# Altium PCB PCB_ControlBoard.PcbDoc
Units mm, origin at the board's own origin, x right, y up, seen from the top; angles counter-clockwise.
Board outline 65 x 70 mm, 2 copper layers (Top Layer, Bottom Layer), stack 1.671 mm thick; 49 components, 36 nets, 166 pads, 34 vias.
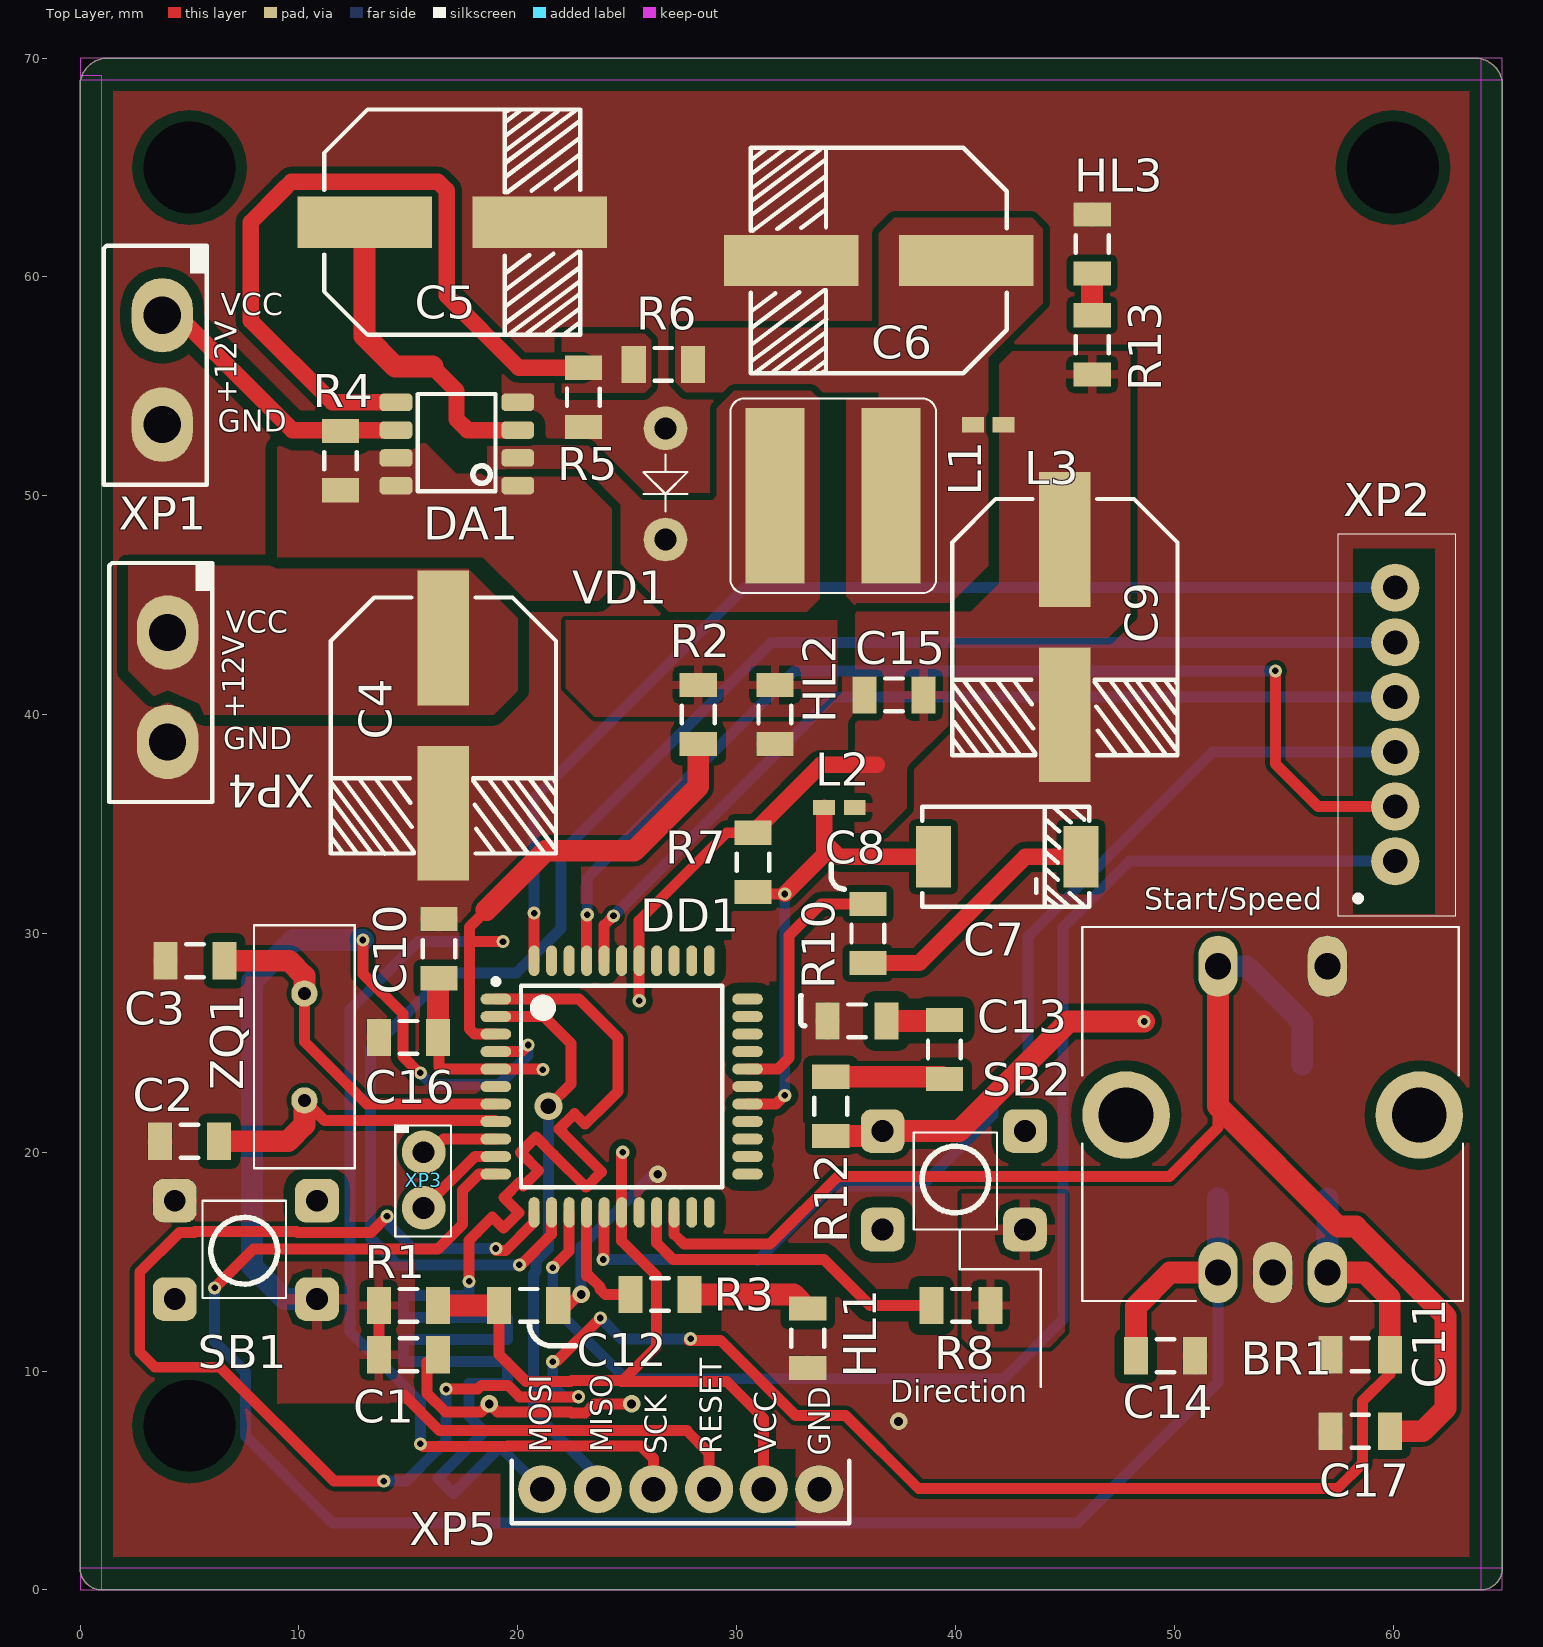
[diagram p0: Top Layer view]
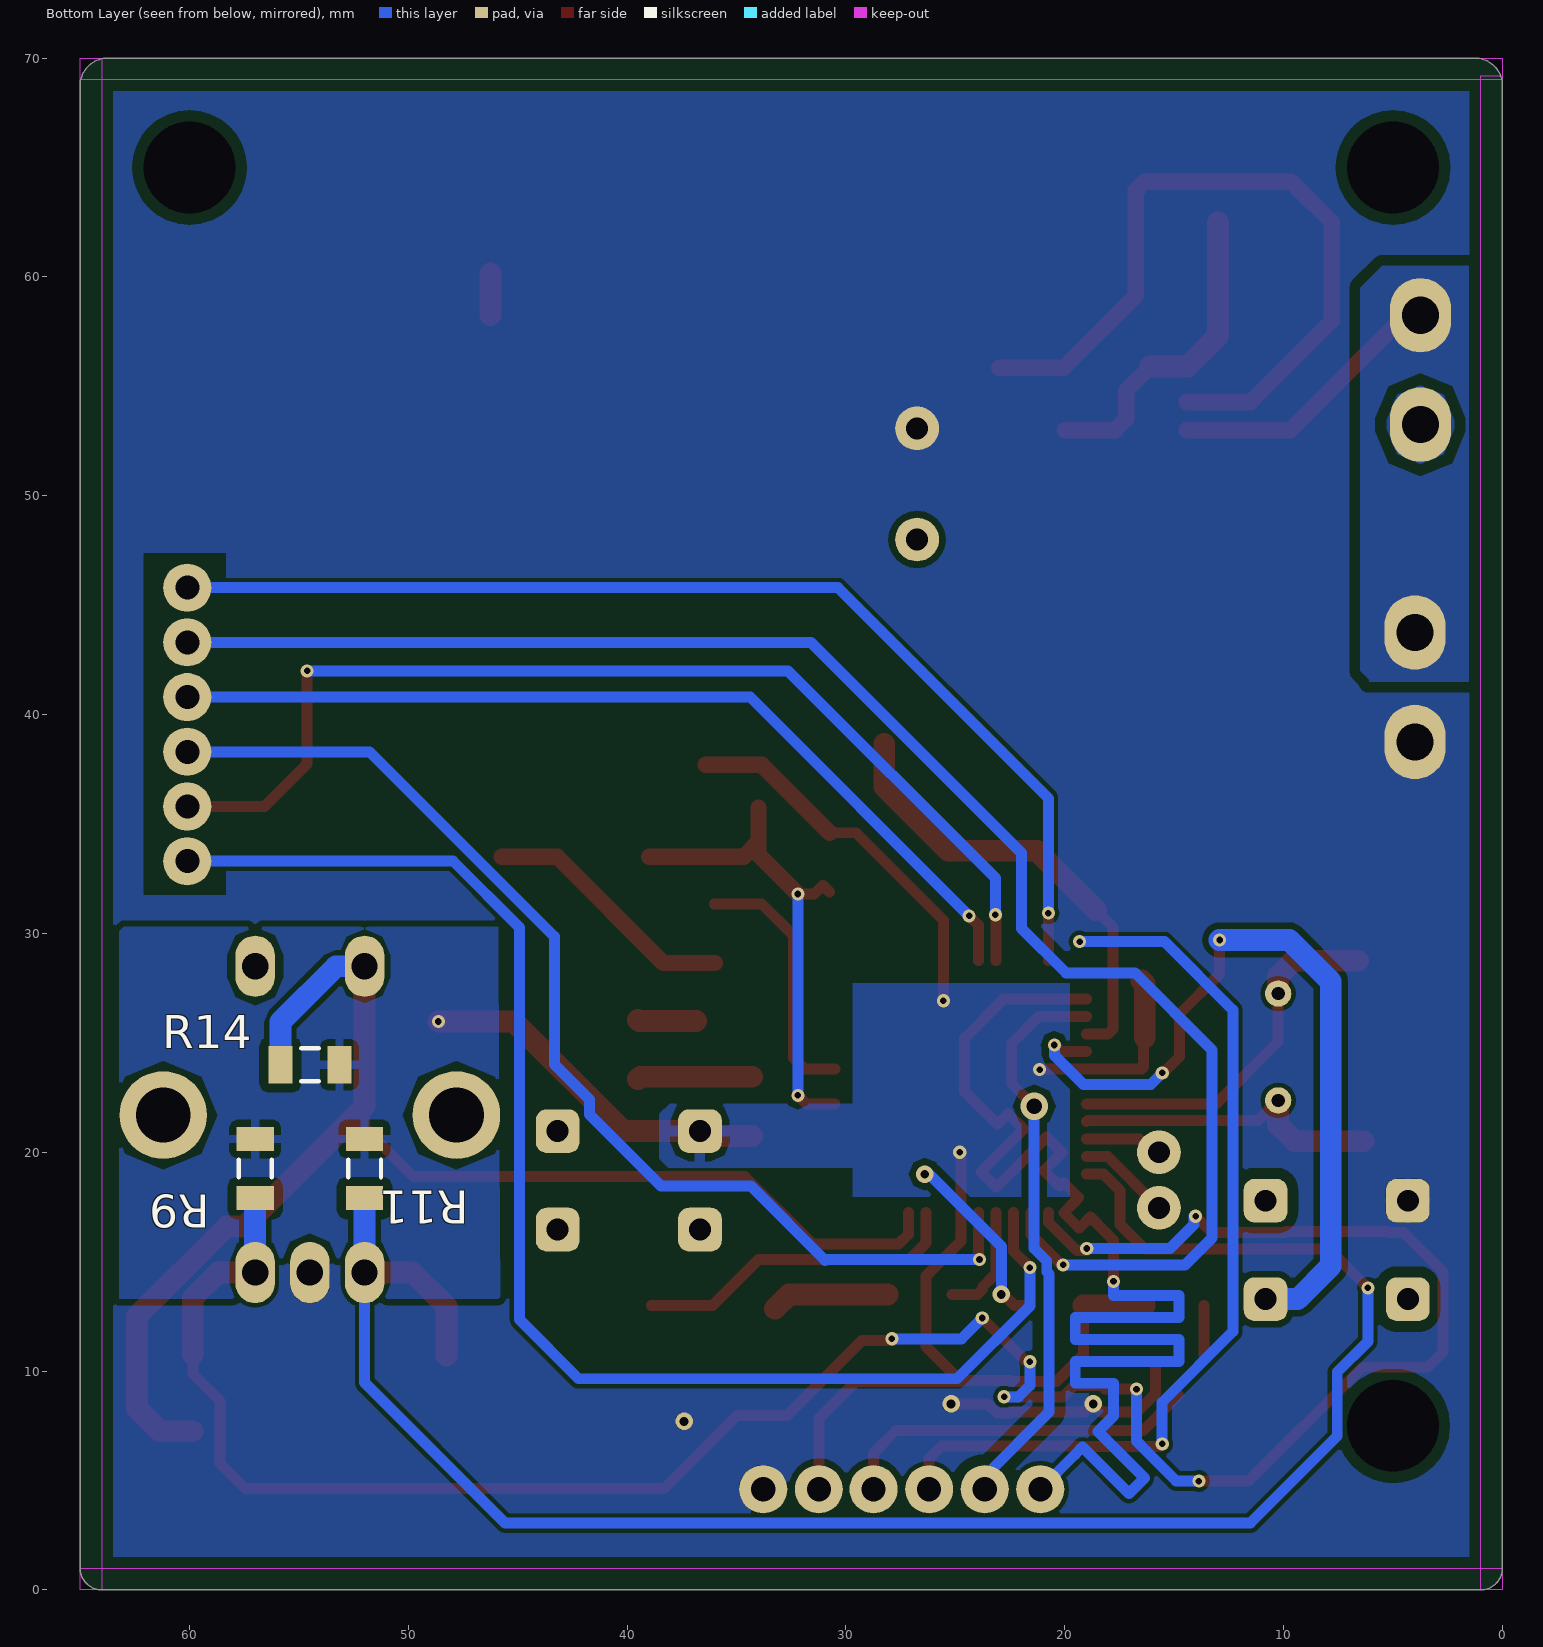
[diagram p1: Bottom Layer view, seen from below]
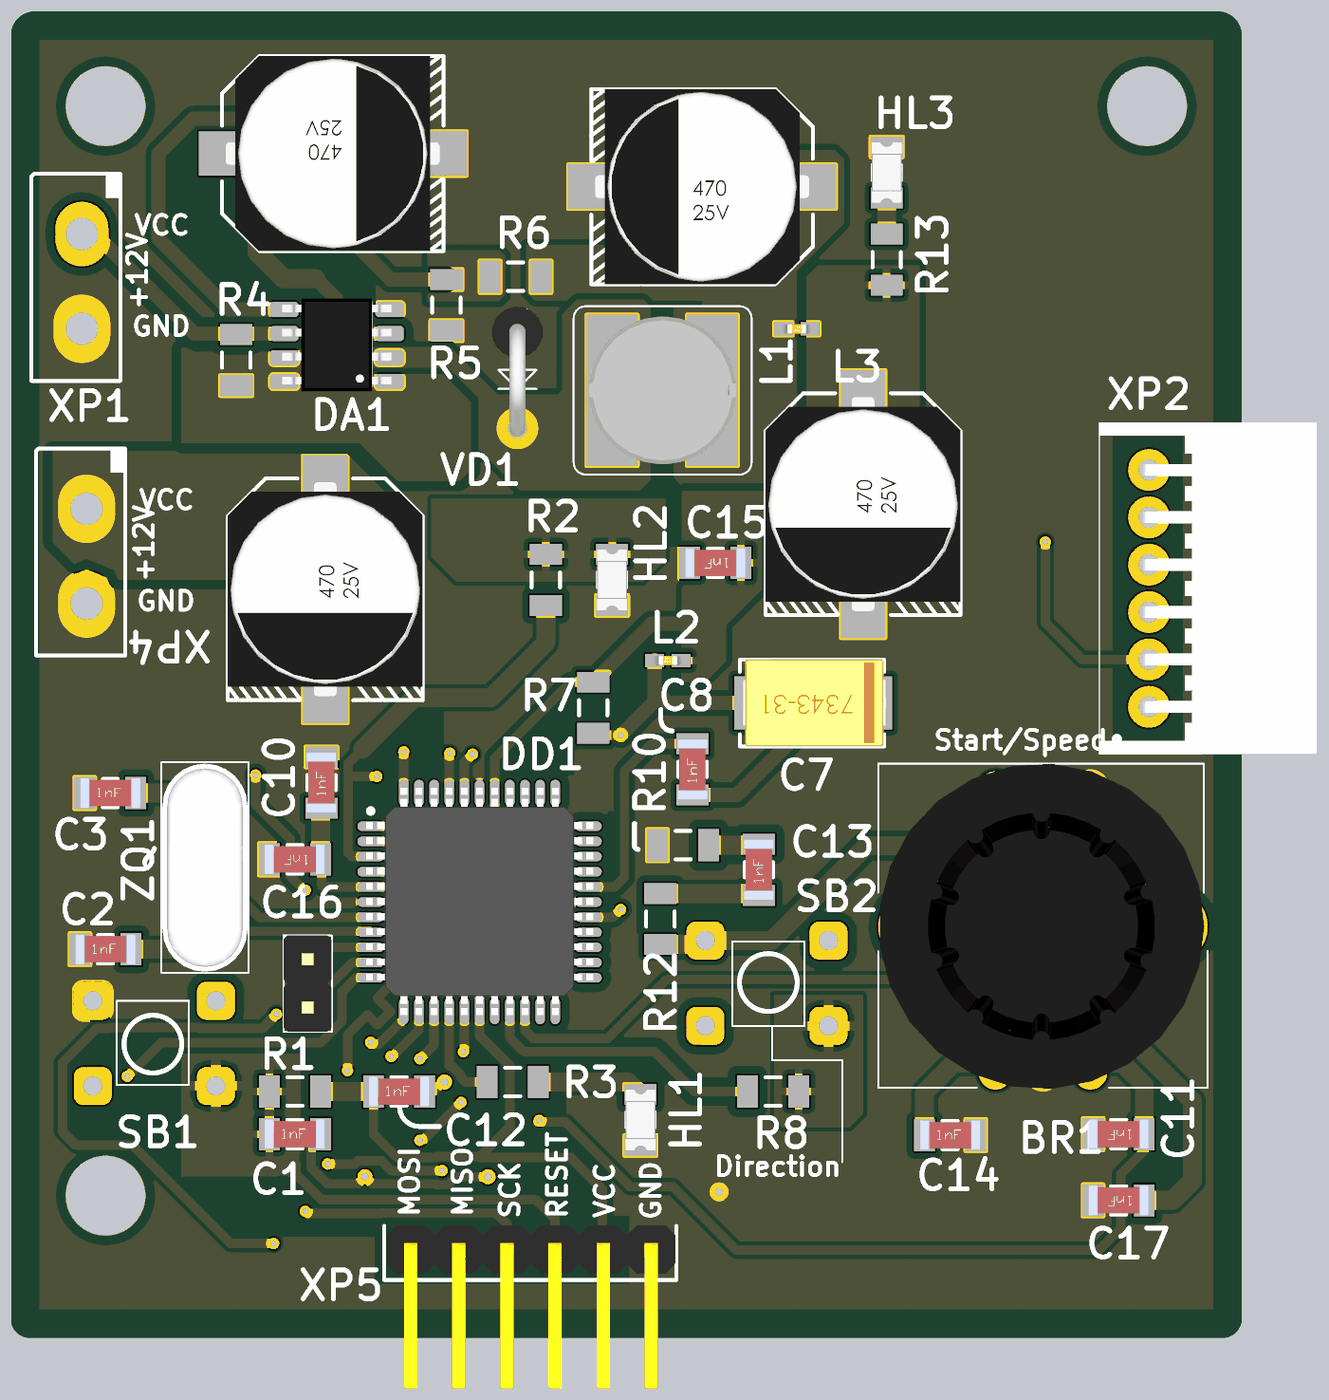
[diagram p2: 3D render of the assembled board from above, using the file's embedded part models]
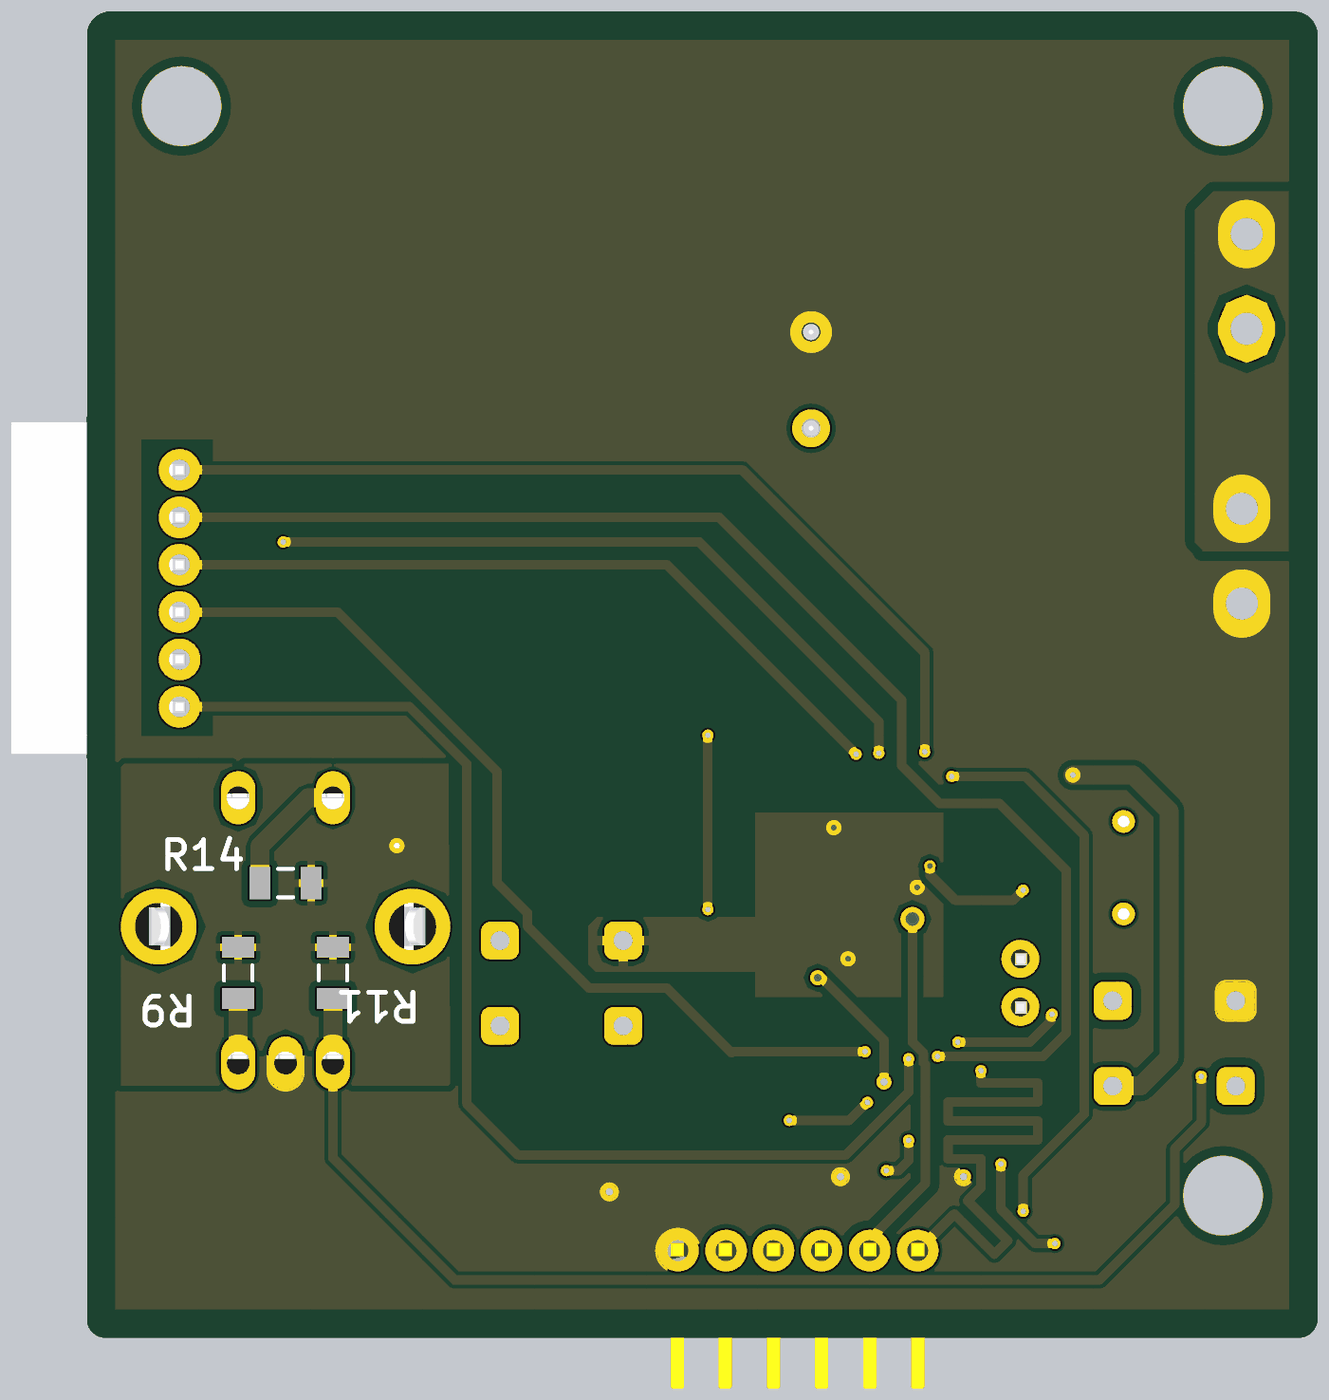
[diagram p3: 3D render of the assembled board from below, using the file's embedded part models]

## Layer stack, top to bottom
Top Solder: solder mask 0.0102, Solder Resist, Dk 3.5
Top Layer: signal copper 0.0356
Dielectric 1: dielectric 1.6, FR-4, Dk 4.8
Bottom Layer: signal copper 0.0356
Bottom Solder: solder mask 0.0102, Solder Resist, Dk 3.5

## Board outline
0,1 0,68.73 cw(c1.27,68.73) 1.27,70 63.73,70 cw(c63.73,68.73) 65,68.73 65,1 cw(c64,1) 64,0 1,0 cw(c1,1)

## Design rules (kind name [scope] priority, off if disabled: settings)
Clearance digit_Clearance [InNetClass('Nets_Signal')OR InNetClass('SPI_Prog')] p1: gap=0.2 ignorepadtopadclearanceinfootprint=FALSE except(0.4: SMDPad-Poly)
Clearance 5V_Clearence [InNetClass('Nets_5Vout')] p2: gap=0.3 ignorepadtopadclearanceinfootprint=FALSE
Clearance power_Clearence [InNetClass('Input_Power')] p3: gap=0.5 ignorepadtopadclearanceinfootprint=FALSE except(0.2: Arc-SMDPad Track-SMDPad SMDPad-SMDPad)
Height [All] p1: minheight=0 maxheight=200 prefheight=12.7
Length [InNetClass('SPI_Prog')] p1: maxlimit=300 minlimit=0
MatchedLengths MatchedLengths_SPI [InNetClass('SPI_Prog')] p1: tolerance=1 checknetsindiffpair=FALSE checkdiffpairvsdiffpair=TRUE checkxsignals=TRUE checkothers=TRUE
PlaneClearance [InNetClass('Nets_5Vout')OR InNetClass('Nets_Signal') OR InNetClass('SPI_Prog')] p1: clearance=0.3
PlaneClearance PlaneClearance_POWER [InPadClass('PowerPads')] p2: clearance=1
PlaneConnect PlaneConnect_1 [InNetClass('Nets_5Vout') OR InNetClass('Nets_Signal')  OR InNetClass('SPI_Prog')] p1: pad.planeconnectstyle=Relief pad.reliefexpansion=0.5 pad.reliefentries=4 pad.reliefconductorwidth=0.4 pad.reliefairgap=0.3 via.planeconnectstyle=Direct via.reliefexpansion=0.508 via.reliefentries=4 via.reliefconductorwidth=0.254 via.reliefairgap=0.254
PlaneConnect PlaneConnect_Power [InPadClass('PowerPads')] p2: planeconnectstyle=Direct reliefexpansion=0.508 reliefentries=4 reliefconductorwidth=0.254 reliefairgap=0.254
PolygonConnect [InPadClass('PowerPads')] p1: connectstyle=Direct reliefconductorwidth=0.254 reliefentries=4 polygonreliefangle="90 Angle" airgapwidth=0.254
PolygonConnect PolygonConnect_Dig_5V [InNetClass('Nets_5Vout') OR InNetClass('Nets_Signal')OR InNetClass('SPI_Prog')] p2: thpad.connectstyle=Relief thpad.reliefconductorwidth=0.5 thpad.reliefentries=4 thpad.polygonreliefangle="90 Angle" thpad.airgapwidth=0.3 smdpad.connectstyle=Relief smdpad.reliefconductorwidth=0.4 smdpad.reliefentries=4 smdpad.polygonreliefangle="90 Angle" smdpad.airgapwidth=0.3 via.connectstyle=Direct via.reliefconductorwidth=0.254 via.reliefentries=4 via.polygonreliefangle="90 Angle" via.airgapwidth=0.254
RoutingVias RoutingVias_Power [InNetClass('Input_Power')] p1: holewidth=0.4 width=0.8 viastyle="Through Hole" minholewidth=0.4 minwidth=0.8 maxholewidth=0.4 maxwidth=0.8
RoutingVias Via_5V_digit [InNetClass('Nets_5Vout')OR InNetClass('Nets_Signal') OR InNetClass('SPI_Prog')] p2: holewidth=0.3 width=0.6 viastyle="Through Hole" minholewidth=0.3 minwidth=0.6 maxholewidth=0.3 maxwidth=0.6
SolderMaskExpansion [All] p1: expansion=0.102
Width Width_digit [InNetClass('Nets_Signal')OR InNetClass('SPI_Prog')] p1: maxlimit=1 minlimit=0.125 preferedwidth=0.5
Width Width_5V [InNetClass('Nets_5Vout')] p2: maxlimit=2 minlimit=0.5 preferedwidth=1
Width Power_Width [InNetClass('Input_Power')] p3: maxlimit=10 minlimit=0.5 preferedwidth=1
27 further rules are at their usual default settings.

## Classes and differential pairs
net class SPI_Prog: MOSI SCK
pad class PowerPads: C4-1 C4-2 C5-1 C5-2 C6-1 C6-2 C9-1 C9-2 DA1-1 DA1-2 DA1-3 DA1-4 DA1-5 DA1-6 DA1-7 DA1-8 L1-1 L1-2 L3-1 L3-2 R4-1 R4-2 R5-1 R5-2 R6-1 R6-2 VD1-1 VD1-2 XP1-1 XP1-2 XP4-1 XP4-2
net class Input_Power: +12V GND NetDA1_1
net class Nets_5Vout: +5V AREF AVCC NetC6_1 NetC7_2 NetDA1_2 NetDA1_5 NetHL3_1 RESET
net class Nets_Signal: DOWN_U DOWN_V DOWN_W ENC1 ENC2 ENC3 NetC13_1 NetDD1_15 NetHL1_1 NetHL2_1 NetR8_2 RxD TxD UP_U UP_V UP_W XTAL1 XTAL2

## Components (designator, comment, footprint, x,y, rotation, side; value= is the part's Value field where it differs from the comment)
BR1 "EN11 - VSM 1 A F 20" EN11-HSM 52,14.5 r0 top
C1 "100nF" CAP1206 15,10.75 r0 top
C2 "22pF" CAP1206 5,20.5 r0 top
C3 "22pF" CAP1206 5.25,28.75 r0 top
C4 "220uF" CAPAE120103X105MTypeG 16.6,39.5 r270 top
C5 "470uF" CAPAE120103X105MTypeG 17,62.5 r0 top
C6 "470uF" CAPAE120103X105MTypeG 36.5,60.75 r180 top
C7 "10uF" "Type D" 39,33.5 r0 top
C8 "100nF" CAP1206 36,30 r90 top
C9 "220uF" CAPAE120103X105MTypeG 45,44 r270 top
C10 "100nF" CAP1206 16.4,29.3 r90 top
C11 "100nF" CAP1206 58.5,10.75 r180 top
C12 "100nF" CAP1206 20.5,13 r0 top
C13 "100nF" CAP1206 39.5,24.7 r90 top
C14 "100nF" CAP1206 49.6,10.7 r0 top
C15 "100nF" CAP1206 37.2,40.9 r180 top
C16 "100nF" CAP1206 15,25.25 r180 top
C17 "100nF" CAP1206 58.5,7.25 r180 top
DA1 "MC34063" SO-8 19.238,50.46 r180 top
DD1 "ATMega16" TQFP80P1200X1200X120-44N 24.75,23 r0 top
HL1 "GNL-1206UYC" LED1206 33.25,11.5 r270 top value=YELLOW
HL2 "GNL-1206UYC" LED1206 31.75,40 r270 top value=YELLOW
HL3 "GNL-1206URC" LED1206 46.25,61.5 r90 top value=RED
L1 "SDR0805-221KL" SDR0805 31.75,50 r270 top value=220uH
L2 "1u" LQG15HN15NJ 34.7,35.75 r0 top
L3 "1u" LQG15HN15NJ 41.5,53.25 r0 top
R1 "1k Ом" 1206 15,13 r0 top
R2 "470" 1206 28.25,40 r90 top
R3 "470" 1206 26.5,13.5 r0 top
R4 "0,33 Ом" 1206 11.9,51.6 r270 top
R5 "1.2k Ом" 1206 23,54.5 r90 top
R6 "3.6kОм" 1206 26.65,56 r0 top
R7 "2 кОм" 1206 30.75,33.25 r90 top
R8 "220" 1206 40.25,13 r0 top
R9 "4.7 кОм" 1206 57,19.25 r90 bottom
R10 "10кОм" 1206 35.5,26 r0 top
R11 "4.7 кОм" 1206 52,19.25 r90 bottom
R12 "130 Ом" 1206 34.3,22.1 r270 top
R13 "470" 1206 46.25,56.9 r270 top
R14 "4.7 кОм" 1206 54.5,24 r180 bottom
SB1 "IT-1109" KLS2 7.5,15.5 r0 top
SB2 "IT-1109" KLS2 40,18.75 r180 top
VD1 "1N5819" DO-41-V 26.75,53.08 r270 top value=40V
XP1 "XY2500R-A-2P" KLS2-EDR-500-2P 3.75,58.25 r270 top value=1000V
XP2 "CWF-6R" CWF-6R 60.1,33.3 r90 top
XP3 "PLS2-1" PLS-2-1 15.7,20 r270 top
XP4 "XY2500R-A-2P" KLS2-EDR-500-2P 4,43.75 r270 top value=1000V
XP5 "PLS1x6" PLS1x6 21.12,4.6 r0 top
ZQ1 "8MHz" HC49-S 10.25,22.37 r90 top

## Footprints (in the part's own frame and the unit in brackets; to place one, negate y for a bottom-side part, rotate by r counter-clockwise, add the part's x,y. Pads: shape width x height; smd on the part's side, far side on the other; paste and mask are expansions set on the pad)
1206 [mm]
  rect 1.1x1.7 smd: 1(-1.35,0) 2(1.35,0)
  silkscreen extent -0.4,-0.75 0.4,0.75, body extent -1.55,-0.83 1.55,0.83, height 0.67
CAP1206 [mm]
  rect 1.1x1.7 smd: 1(-1.35,0) 2(1.35,0)
  silkscreen extent -0.4,-0.75 0.4,0.75, body extent -1.6,-0.8 1.6,0.8, height 1.25
CAPAE120103X105MTypeG [mm] "Aluminum Electrolytic Capacitor, Body 11,70x10,30x10,50mm, IPC Low Density"
  rect 6.15x2.35 smd: 1(-4,0) 2(4,0)
  silkscreen extent -5.85,-5.15 5.86,5.15, body extent -5.65,-5.15 5.65,5.15, height 10.8
CWF-6R [mm]
  round 2.2 hole 1.1: 1(0,0) 2(2.5,0) 3(5,0) 4(7.5,0) 5(10,0) 6(12.5,0)
  silkscreen extent -2.5,-2.78 14.97,2.63, body extent -2.5,-8.88 15,2.62, height 5.75
DO-41-V [mm] "Vertical"
  round 2 hole 1: 1(0,0) 2(5.08,0)
  silkscreen extent 1.2,-1 3.8,1, body extent -1.35,-1.35 5.51,1.35, height 8.43
EN11-HSM [mm]
  oval 1.8x2.8 hole 1.2: 1(0,0) 2(5,0) 3(2.5,0) 4(5,14) 5(0,14)
  round 4 hole 2.5: -(-4.2,7.2) -(9.2,7.2)
  silkscreen extent -6.2,-1.3 11.2,15.8, body extent -6.18,-1.39 11.02,15.81, height 34
HC49-S [mm]
  round 1.2 hole 0.6: 1(0,0) 3(4.88,0)
  silkscreen extent -3.1,-2.3 8,2.3, body extent -3.05,-2.25 7.93,2.25, height 3.6
KLS2 [mm]
  rrect50% 2x2 hole 1: 1(-3.175,2.286) 2(3.325,2.286) 3(-3.175,-2.214) 4(3.325,-2.214)
  silkscreen extent -1.91,-2.16 1.9,2.29, body extent -3.12,-3 3.38,3, height 7.5
KLS2-EDR-500-2P [mm]
  oval 3.4x2.8 hole 1.7: 1(0,0) 2(5,0)
  silkscreen extent -3.18,-2.67 7.75,2.03, body extent -3,-20.69 7.49,1.64, height 18.12
LED1206 [mm]
  rect 1.1x1.7 smd: 1(-1.35,0) 2(1.35,0)
  silkscreen extent -0.4,-0.75 0.4,0.75, body extent -1.6,-0.8 1.6,0.8, height 1.1
LQG15HN15NJ [mm]
  rect 1x0.7 smd: 1(-0.7,0) 2(0.7,0)
  body extent -0.73,-0.25 0.73,0.25, height 0.51
PLS1x6 [mm]
  round 2.2 hole 1.1: 1(0,0) 2(2.54,0) 3(5.08,0) 4(7.62,0) 5(10.12,0) 6(12.66,0)
  silkscreen extent -1.4,-1.55 14.03,1.3, body extent -1.28,-7.29 13.96,1.33, height 6.55
PLS-2-1 [mm]
  round 2 hole 1: 1(0,0) 2(2.54,0)
  silkscreen extent -1.25,-1.33 3.85,1.25, body extent -1.24,-1.3 3.84,1.24, height 8.54
SDR0805 [mm]
  rect 8x2.7 smd: 1(0,0) 2(0,5.3)
  silkscreen extent -4.45,-2.03 4.44,7.37, body extent -3.9,-1.23 3.9,6.57, height 5.3
SO-8 [mm]
  rrect50% 1.505x0.802 smd: 1(-0.762,0) 2(-0.762,-1.27) 3(-0.762,-2.54) 4(-0.762,-3.81) 5(4.8,-3.81) 6(4.8,-2.54) 7(4.8,-1.27) 8(4.8,0)
  silkscreen extent 0.25,-4.19 3.81,0.25, body extent -0.86,-4.39 4.92,0.51, height 1.45
TQFP80P1200X1200X120-44N [mm] "TQFP, 44-Leads, Body 10,00x10,00mm, Pitch 0,80mm, IPC Medium Density"
  oval 1.4x0.5 smd: 1(-5.75,4) 2(-5.75,3.2) 3(-5.75,2.4) 4(-5.75,1.6) 5(-5.75,0.8) 6(-5.75,0) 7(-5.75,-0.8) 8(-5.75,-1.6) 9(-5.75,-2.4) 10(-5.75,-3.2) 11(-5.75,-4) 23(5.75,-4) 24(5.75,-3.2) 25(5.75,-2.4) 26(5.75,-1.6) 27(5.75,-0.8) 28(5.75,0) 29(5.75,0.8) 30(5.75,1.6) 31(5.75,2.4) 32(5.75,3.2) 33(5.75,4)
  oval 0.5x1.4 smd: 12(-4,-5.75) 13(-3.2,-5.75) 14(-2.4,-5.75) 15(-1.6,-5.75) 16(-0.8,-5.75) 17(0,-5.75) 18(0.8,-5.75) 19(1.6,-5.75) 20(2.4,-5.75) 21(3.2,-5.75) 22(4,-5.75) 34(4,5.75) 35(3.2,5.75) 36(2.4,5.75) 37(1.6,5.75) 38(0.8,5.75) 39(0,5.75) 40(-0.8,5.75) 41(-1.6,5.75) 42(-2.4,5.75) 43(-3.2,5.75) 44(-4,5.75)
  silkscreen extent -5.87,-4.6 4.6,4.92, body extent -6,-5.97 6,6.03, height 1.1
"Type D" [mm]
  rect 1.6x2.8 smd: 1(0,0) 2(6.731,0)
  silkscreen extent -0.51,-2.29 7.11,2.29, body extent -0.37,-2.29 7.23,2.31, height 3.1

## Part data
BR1: library part Encoder, Manufacturer=TTelectronics, Package=CWF-3R, Documentation=http://belchip.by/sitedocs/18676.pdf, Part Number="EN11 - VSM 1 A F 20", Price=0.05, Quantity=3, ShoppingPlace=http://belchip.by/product/?selected_product=17773
C1 C8 C10 C11 C12 C13 C14 C15 C16 C17: library part Capasitor, Manufacturer=Samsung, Package=1206, Part Number=CL31B104KBCNNNC, Voltage=50V, Price=0,035, Quantity=4, ShoppingPlace=http://belchip.by/product/?selected_product=31093
C2 C3: library part Capasitor, Manufacturer=Samsung, Package=1206, Part Number=NPO-50V, Voltage=50V, Price=0.025, Quantity=2, ShoppingPlace=http://belchip.by/product/?selected_product=00259
C4 C9: library part "Capasitor Electrolit", Manufacturer=Китай, Package=10x10, Part Number="220uF 35V 10x10", Power=10V, Documentation=http://belchip.by/product/?selected_product=32976, Price=1, Quantity=3, ShoppingPlace=http://belchip.by/product/?selected_product=32976
C5 C6: library part "Capasitor Electrolit", Manufacturer=EPCOS, Package=8x10, Part Number=B41121A3477M000, Power=25V, Documentation=https://static.chipdip.ru/lib/051/DOC000051935.pdf, Price=2, ShoppingPlace=https://www.ru-chipdip.by/product/b41121a3477m000
C7: library part "Capasitor Electrolit", Manufacturer=Vishay, Package=TypeD, Part Number="D 10uF 25V 20", Power=25V, Price=0,23, ShoppingPlace=http://belchip.by/product/?selected_product=00096
DA1: Manufacturer="ON Semiconductor", Package=SO-8, Part Number=MC34063, Price=0,3, Quantity=1, ShoppingPlace=http://belchip.by/product/?selected_product=28823
DD1: library part "ATMega 16", Manufacturer=ATmel, Package=TQFP44, Documentation=http://belchip.by/sitedocs/00002095.pdf, Part Number=ATMega16, Price=5,2, Quantity=1, ShoppingPlace=http://belchip.by/product/?selected_product=02095
HL1 HL2 HL3: library part LED, Manufacturer=G-NOR, Package=1206, Price=0.06, Quantity=6
  HL1 HL2: Part Number=GNL-1206UYC, ShoppingPlace=http://belchip.by/product/?selected_product=00949
  HL3: Part Number=GNL-1206URC, ShoppingPlace=http://belchip.by/product/?selected_product=00953
L1: library part Induc_SD1105, Manufacturer=BOURNS, Package=SDR0805, Documentation=http://docs-europe.electrocomponents.com/webdocs/150d/0900766b8150ddf1.pdf, Part Number=SDR0805-221KL, Price=1, Quantity=1, ShoppingPlace=https://www.ru-chipdip.by/product/sdr1105-201k
L2 L3: library part Inductor, Manufacturer=Bourns, Package=1812, Part Number=CM453232-1R0KL, Price=0.225, Quantity=2, ShoppingPlace=https://www.ru-chipdip.by/product/cm453232-1r0kl
R1: library part Resistor, Manufacturer="Royal Ohm", Package=1206, Part Number=RC1206FR-071KL, Power=0.25W, Price=0,02, Quntity=1, ShoppingPlace=http://belchip.by/product/?selected_product=19295
R2 R3 R13: library part Resistor, Manufacturer=YAGEO, Package=1206, Part Number=RC1206JR-07470RL, Power=0.25W, Price=0.15, Quntity=3, ShoppingPlace=http://belchip.by/product/?selected_product=32449
R4: library part Resistor, Manufacturer="Royal Ohm", Package=1206, Part Number=RC1206FR-12060R33, Power=0.25W, Documentation=http://belchip.by/sitedocs/18520.pdf, Price=0,5, Quntity=1, ShoppingPlace=http://belchip.by/product/?selected_product=32979
R5: library part Resistor, Manufacturer=РФ, Package=1206, Part Number="1206 1.2K", Power=0.25W, Price=0,15, Quntity=1, ShoppingPlace=http://belchip.by/product/?selected_product=01386
R6: library part Resistor, Manufacturer=РФ, Package=1206, Part Number="1206 3.6K", Power=0.25W, Price=1, Quntity=1, ShoppingPlace=http://belchip.by/product/?selected_product=01396
R7: library part Resistor, Manufacturer=РФ, Package=1206, Part Number="SMD 1206 2K", Power=0,25W, Price=0,15, Quntity=1, ShoppingPlace=http://belchip.by/product/?selected_product=01391
R8: library part Resistor, Manufacturer="Royal Ohm", Package=1206, Part Number=HP06-220R5, Power=0.25W, Price=0,02, Quntity=1, ShoppingPlace=http://belchip.by/product/?selected_product=06325
R9 R11 R14: library part Resistor, Manufacturer=YAGEO, Package=1206, Part Number=RC1206JR-074K7L, Power=0.25W, Price=0,15, Quntity=4, ShoppingPlace=http://belchip.by/product/?selected_product=01399
R10: library part Resistor, Manufacturer=YAGEO, Package=1206, Part Number=RC1206JR-0710KL, Power=0.25W, Price=0.15, Quntity=1, ShoppingPlace=http://belchip.by/product/?selected_product=31101
R12: library part Resistor, Manufacturer=RF, Package=1206, Part Number=130R, Power=0.25W, Price=0,15, Quntity=1, ShoppingPlace=http://belchip.by/product/?selected_product=01363
SB1 SB2: library part Button, Manufacturer=RUICHI, Package=4,5x4,5x3,8, Part Number=IT-1109, Price=0,1, Quantity=2, ShoppingPlace=http://belchip.by/product/?selected_product=03267
VD1: Manufacturer=GALAXY, Package=SOD-123, Power=1A, Part Number=1N5819, Price=0.12, Quantity=3, ShoppingPlace=http://belchip.by/product/?selected_product=08853
XP1 XP4: library part Connector_Power, Manufacturer=РБ, Package=XY2500R-A-2P, Part Number=XY2500R-A-2P, Price=0,10, Quantity=2, ShoppingPlace=http://belchip.by/product/?selected_product=14514
XP2 XP3: Manufacturer=KLS
  XP2: Part Number=CWF-6R, Price=1, Quantity=1, ShoppingPlace=http://belchip.by/product/?selected_product=32444
  XP3: Package=PLS2-1, Part Number=PLS2-1, Price=0.05, Quantity=3, ShoppingPlace=http://belchip.by/product/?selected_product=31993
XP5: Manufacturer=KLS, Part Number=KLS1x6, Price=1, Quantity=1, ShoppingPlace=http://belchip.by/product/?selected_product=02010
ZQ1: library part Rzanator, Manufacturer=CHina, Package=HC-51, Part Number=HC49US-FF5F8.0000, Price=0,37, Quantity=1, ShoppingPlace=http://belchip.by/product/?selected_product=04623

## Free pads (board coordinates)
  round 0 hole 4.2: -(5,7.5) -(5,65) -(60,65)

## Via types
v1: diameter 0.6, hole 0.3, Top Layer to Bottom Layer, 28 vias
v2: diameter 0.8, hole 0.4, Top Layer to Bottom Layer, 5 vias
v3: diameter 1.27, hole 0.711, Top Layer to Bottom Layer, 1 vias

## Nets (pads, with @x,y where several pads share a name; then routed paths per layer and width w, separated by ;. In a path a pad name is that pad's centre, name@x,y a point inside that pad or via, vN(x,y) a via of type N, cw(c..) or ccw(c..) an arc to the next point about the centre after c; other vN are vias at no path point)
+5V: C9.1 C10.1 C12.1 C15.1 C16.1 DD1.5 DD1.17 DD1.38 L2.2 L3.2 R1.2 R7.2 R9.2 R11.2 R12.2 R13.2 R14.2 SB2.4 XP5.5 | length 76.2
  Top Layer w0.5: C16.1 16.4,25.2 16.4,23.9 16.5,23.8 DD1.5 21.125,23.8 v1(21.15,23.775) ; C12.1 19.15,10.75 20.375,9.525 22.414,9.525 22.464,9.575 24.7,9.575 24.75,9.525 ; v1(24.8,20) 24.75,19.95 DD1.17 24.75,15.95 26.35,14.35 26.35,11.125 24.75,9.525 ; v1(25.55,26.925) DD1.38 25.55,30.6 29.55,34.6 R7.2 ; XP5.5 31.24,7.835 29.55,9.525 24.75,9.525
  Top Layer w0.75: R7.2 33.85,37.7 36.4,37.7
  Top Layer w1: R1.2 C12.1 ; C16.1 16.35,27.7 C10.1@16.5,27.85 ; R12.2 36.461,20.75 SB2.4 40.164,20.964 45.175,25.975 v1(48.625,25.975)
+12V: C4.1 DA1.6 R4.1 XP1.1 XP4.1 | length 12.9
  Top Layer w0.75: XP1.1 4.45,58.25 9.7,53 DA1.6
AREF: C8.2 DD1.29 | length 11.9
  Top Layer w0.5: DD1.29 31.9,23.8 32.4,24.3 32.4,29.9 33.85,31.35 C8.2
AVCC: C7.1 DD1.27 L2.1 R7.1 | length 22.8
  Top Layer w0.5: DD1.27 31.8,22.2 v1(32.2,22.6) ; R7.1 31.05,32.2 31.45,31.8 v1(32.2,31.8)
  Top Layer w0.75: v1(32.2,31.8) 34,33.6 34,34.175 ; L2.1 34,34.175 ; C7.1 34.675,33.5 34,34.175
  Bottom Layer w0.5: v1(32.2,22.6) v1(32.2,31.8)
DIR_BUT: DD1.19 R8.1 | length 15.1
  Top Layer w0.5: DD1.19 26.35,15.85 27.1,15.1 34,15.1 36.1,13 R8.1
DOWN_U: DD1.41 XP2.2 | length 49.7
  Top Layer w0.5: DD1.41 23.15,30.825 v1(23.175,30.85) ; v1(54.625,42) 54.625,37.75 56.575,35.8 XP2.2
  Bottom Layer w0.5: v1(23.175,30.85) 23.175,32.525 32.65,42 v1(54.625,42)
DOWN_V: DD1.40 XP2.4 | length 42.1
  Top Layer w0.5: DD1.40 23.95,30.375 v1(24.375,30.8)
  Bottom Layer w0.5: v1(24.375,30.8) 34.375,40.8 XP2.4
DOWN_W: DD1.44 XP2.6 | length 50.8
  Top Layer w0.5: DD1.44 v1(20.75,30.925)
  Bottom Layer w0.5: v1(20.75,30.925) 20.75,36.175 30.375,45.8 XP2.6
ENC1: BR1.5 C17.1 DD1.20 R14.1 | length 64
  Top Layer w0.5: DD1.20 27.15,16.25 27.6,15.8 31.525,15.8 34.625,18.9 49.775,18.9 52,21.125 52,22.1
  Top Layer w1: BR1.5 52,22.1 57.5,16.6 58.297,16.6 62.4,12.497 62.4,8.3 61.35,7.25 C17.1
  Bottom Layer w1: BR1.5 53.3,28.5 55.85,25.95 R14.1
ENC2: BR1.1 C14.1 DD1.11 R11.1 | length 87.1
  Top Layer w0.5: v1(6.15,13.8) 7.925,15.575 16.35,15.575 17.475,16.7 17.475,18.245 18.23,19 DD1.11
  Top Layer w1: C14.1 48.25,12.95 49.8,14.5 BR1.1
  Bottom Layer w0.5: v1(6.15,13.8) 6.15,11.356 7.55,9.956 7.55,7.025 11.525,3.05 45.575,3.05 52,9.475 BR1.1
  Bottom Layer w1: BR1.1 R11.1
ENC3: BR1.2 C11.1 DD1.12 R9.1 | length 109.6
  Top Layer w0.5: v1(13.875,4.975) 11.6,4.975 6.4,10.175 3.425,10.175 2.725,10.875 2.725,14.525 4.536,16.336 5.218,16.336 5.258,16.375 9.892,16.375 9.931,16.336 13.286,16.336 v1(14.025,17.075) ; v1(16.725,9.175) 18.173,9.175 18.348,9.35 19.56,9.35 20.085,8.825 v1(22.775,8.825) ; v1(19,15.6) 19,15.5 19.45,15.5 20.75,16.8 DD1.12 ; v1(21.6,10.425) 21.6,10.475 21.825,10.475 v1(23.775,12.425) ; v1(27.9,11.475) 27.825,11.4 29.275,11.4 32.7,7.975 34.975,7.975 38.325,4.625 57.45,4.625 58.6,5.775 58.6,8.625 59.85,9.875 C11.1
  Top Layer w1: BR1.2 58.7,14.5 59.85,13.35 C11.1
  Bottom Layer w0.5: v1(13.875,4.975) 14.911,4.975 16.3,6.364 16.3,6.375 16.725,6.8 v1(16.725,9.175) ; v1(14.025,17.075) 14.1,17.075 14.1,16.7 15.2,15.6 v1(19,15.6) ; v1(21.6,10.425) 21.6,9.35 22.125,8.825 v1(22.775,8.825) ; v1(23.775,12.425) 24.725,11.475 v1(27.9,11.475)
  Bottom Layer w1: BR1.2 R9.1
GND: BR1.3 BR1.4 C1.2 C2.1 C3.1 C4.2 C5.2 C6.2 C9.2 C10.2 C11.2 C12.2 C14.2 C15.2 C16.2 C17.2 DA1.4 DD1.6 DD1.18 DD1.28 DD1.39 HL1.2 HL2.2 HL3.2 R5.1 R10.1 SB1.1 VD1.1 XP1.2 XP4.2 XP5.6 | length 20.1
  Top Layer w0.5: C1.2@15.85,10.425 15.85,8.982 16.707,8.125 18.325,8.125 v2(18.7,8.5) 19.075,8.125 22.414,8.125 22.464,8.075 23.086,8.075 23.511,8.5 v2(25.2,8.5) ; C12.2 22.3,13 22.9,13.6 v2(22.9,13.5)
  Bottom Layer w0.5: v2(22.9,13.5) 22.9,15.7 26.2,19 v2(26.4,19)
  other v2: 37.4,7.7
MISO: DD1.2 XP5.2 | length 26.2
  Top Layer w0.5: DD1.2 21.2,26.2 22.425,24.975 22.425,23.125 v3(21.4,22.1)
  Bottom Layer w0.5: v3(21.4,22.1) 21.4,15.6 20.826,15.026 20.826,14.539 20.725,14.438 20.725,8.125 23.66,5.19 XP5.2
MOSI: DD1.1 XP5.1 | length 65.9
  Top Layer w0.5: 17.775,15.975 18.129,16.329 18.836,17.036 19.343,16.528 20.05,17.235 19.543,17.743 19.363,17.923 20.07,18.63 20.25,18.45 20.957,19.157 20.124,19.99 20.831,20.697 21.664,19.864 23.129,18.4 23.836,19.107 22.371,20.571 21.888,21.054 22.595,21.761 23.078,21.278 24.1,22.3 24.575,22.775 24.575,25.225 22.8,27 DD1.1 ; v1(17.776,14.1) 17.776,15.974
  Bottom Layer w0.5: v1@17.775,14.099 17.775,13.875 17.775,13.445 14.775,13.445 14.775,12.445 17.775,12.445 19.525,12.445 19.525,11.445 17.775,11.445 14.775,11.445 14.775,10.445 17.775,10.445 19.525,10.445 19.525,9.445 17.775,9.445 17.775,8.445 17.775,7.945 17.777,7.943 18.484,7.236 16.363,5.114 17.07,4.407 19.191,6.529 19.545,6.175 XP5.1
NetC5_1: C5.1 DA1.3 | length 14.7
  Top Layer w0.75: 16.1,55.9 17.2,54.8 17.2,53.5 17.7,53 DA1.3
  Top Layer w1: C5.1 13,57.3 14.4,55.9 16.1,55.9
NetC6_1: C6.1 L1.2 L3.1 R6.2
NetC7_2: C7.2 C8.1 | length 11.7
  Top Layer w0.75: C8.1 38.35,28.65 43.2,33.5 C7.2
NetC13_1: C13.1 R12.1 | length 5.2
  Top Layer w1: R12.1 39.4,23.45 C13.1
NetC13_2: C13.2 R10.2 | length 2.7
  Top Layer w1: R10.2 39.45,26 C13.2
NetDA1_1: DA1.1 DA1.7 DA1.8 R4.2
NetDA1_2: DA1.2 L1.1 VD1.2
NetDA1_5: DA1.5 R5.2 R6.1 | length 35
  Top Layer w0.75: DA1.5 11.53,54.27 7.8,58 7.8,62.5 9.25,63.95 9.25,63.955 9.645,64.35 16.355,64.35 16.75,63.955 16.75,59.15 20.05,55.85 R5.2
NetDD1_15: DD1.15 R3.1 | length 5.3
  Top Layer w0.5: DD1.15 23.15,14.35 23.252,14.35 23.75,13.852 23.75,13.75 24,13.5 R3.1
NetHL1_1: HL1.1 R3.2 | length 5.4
  Top Layer w1: R3.2@28.1,13.5 32.6,13.5 HL1.1
NetHL2_1: HL2.1 R2.2
NetHL3_1: HL3.1 R13.1 | length 1.9
  Top Layer w1: R13.1 HL3.1
NetR8_2: R8.2 SB2.1
RESET: C1.1 DD1.4 R1.1 SB1.4 XP5.4 | length 56.4
  Top Layer w0.5: v1(12.925,29.7) 12.925,28.153 14.75,26.328 14.75,24.375 15.5,23.625 v1(15.55,23.625) ; C1.1 R1.1 ; 14.8,8.9 16.425,7.275 27.725,7.275 28.74,6.26 XP5.4 ; DD1.4 20.175,24.6 v1(20.475,24.9)
  Bottom Layer w0.5: v1(15.55,23.625) 16.075,23.1 19.15,23.1 20.475,24.425 v1(20.475,24.9)
  Bottom Layer w1: SB1.4 9.364,13.286 7.85,14.8 7.85,27.8 9.75,29.7 v1(12.925,29.7)
RxD: DD1.9 XP3.1 | length 3.5
  Top Layer w0.5: XP3.1 16,20 16.6,20.6 DD1.9
SCK: DD1.3 R2.1 XP5.3 | length 64.3
  Top Layer w0.5: v1(15.55,6.675) 15.675,6.55 19.508,6.55 19.533,6.575 25.625,6.575 26.2,6 XP5.3 ; 18.575,31.075 17.8,30.3 17.8,29.625 ; DD1.3 18.025,25.4 17.8,25.625 17.8,29.625 ; v1(19.325,29.625) 17.8,29.625
  Top Layer w1: 18.575,31.075 21.275,33.775 25.325,33.775 28.25,36.7 R2.1
  Bottom Layer w0.5: v1(15.55,6.675) 15.55,8.575 12.325,11.8 12.325,26.5 15.45,29.625 v1(19.325,29.625)
TxD: DD1.10 XP3.2 | length 4.3
  Top Layer w0.5: XP3.2 18.04,19.8 DD1.10
UP_U: DD1.14 XP2.1 | length 64.8
  Top Layer w0.5: v1(21.6,14.725) 22.35,15.475 DD1.14
  Bottom Layer w0.5: v1(21.6,14.725) 21.6,12.975 24.925,9.65 42.225,9.65 44.925,12.35 44.925,30.275 47.95,33.3 XP2.1
UP_V: DD1.16 XP2.3 | length 51.8
  Top Layer w0.5: v1(23.9,15.1) 23.95,15.15 DD1.16
  Bottom Layer w0.5: v1(23.9,15.1) 30.9,15.1 30.95,15.05 34.35,18.45 38.45,18.45 41.725,21.725 41.725,22.414 43.325,24.014 43.325,29.85 51.775,38.3 XP2.3
UP_W: DD1.13 XP2.5 | length 75.5
  Top Layer w0.5: v1(20.076,14.85) 20.15,14.85 21.55,16.25 DD1.13
  Bottom Layer w0.5: v1(20.076,14.85) 18.689,14.85 14.5,14.85 13.275,16.075 13.275,24.675 16.8,28.2 19.95,28.2 21.975,30.225 21.975,33.675 31.6,43.3 XP2.5
XTAL1: C2.2 DD1.8 ZQ1.1 | length 14.5
  Top Layer w0.5: ZQ1.1 11.17,21.45 18.95,21.45 DD1.8
  Top Layer w1: C2.2 9.5,20.5 10.25,21.25 ZQ1.1
XTAL2: C3.2 DD1.7 ZQ1.3 | length 16.9
  Top Layer w0.5: ZQ1.3 10.25,25.05 13.1,22.2 DD1.7
  Top Layer w1: C3.2 9.55,28.75 10.25,28.05 ZQ1.3
pads on no net: BR1.- DD1.21 DD1.22 DD1.23 DD1.24 DD1.25 DD1.26 DD1.30 DD1.31 DD1.32 DD1.33 DD1.34 DD1.35 DD1.36 DD1.37 DD1.42 DD1.43 SB1.2 SB1.3 SB2.2 SB2.3

## Polygon pours and split planes (outlines as drawn)
+5V on Bottom Layer "Top Overlay-No Net" (solid, remove dead copper, pour order 24): 45.9,30.3 63,30.3 63.2,30.1 63.2,13.3 45.8,13.3
+12V on Bottom Layer "Top Overlay-No Net" (solid, remove dead copper, pour order 0): 1,41.5 6.1,41.5 6.1,41.6 6.5,42 6.5,59.5 5.5,60.5 1,60.5
+5V on Bottom Layer "Top Overlay-No Net" (solid, remove dead copper, pour order 26): 19.775,27.725 29.7,27.725 29.7,17.975 19.775,17.975
+5V on Bottom Layer "Top Overlay-No Net" (solid, remove dead copper, pour order 32): 24.075,19.3 38.125,19.3 38.525,19.7 38.525,21.75 38.05,22.225 24.075,22.225
GND on Bottom Layer "BOTTOM_GND_OutLine" (solid, remove dead copper, pour order 39): 0,1 0,68.73 cw(c1.27,68.73) 1.27,70 63.73,70 cw(c63.73,68.73) 65,68.73 65,1 cw(c64,1) 64,0 1,0 cw(c1,1)
+5V on Top Layer "Top Overlay-No Net" (solid, remove dead copper, pour order 16): 35.4,34.6 36.7,34.6 37.8,35.7 37.8,37.6 39.7,39.5 39.7,43.3 39.9,43.5 47,43.5 48,44.5 48,46 42,46 40.7,44.7 35.4,44.7
NetC6_1 on Top Layer "Top Overlay-No Net" (solid, remove dead copper, pour order 34): 27.2,57.675 27.2,55.2 27.675,54.725 37.975,54.725 38.925,55.675 38.925,57.675
NetR8_2 on Top Layer "Top Overlay-No Net" (solid, remove dead copper, pour order 20): 40.3,18.1 40.3,11.5 40.7,11.1 44.3,11.1 45,11.8 45,18.1
NetHL2_1 on Top Layer "Top Overlay-No Net" (solid, remove dead copper, pour order 18): 22.2,44.3 22.2,41.2 23.5,39.9 33.4,39.9 34.6,41.1 34.6,44.3
+5V on Top Layer "Top Overlay-No Net" (solid, remove dead copper, pour order 12): 48,44.5 43,44.5 42,45.5 42,56 42.6,56.6 48,56.6
NetC6_1 on Top Layer "Top Overlay-No Net" (solid, remove dead copper, pour order 10): 35,54.4 35,45.4 35.4,45 35.5,45.1 39.8,45.1 41.5,46.8 41.5,56.3 44,58.8 44,62.2 43.5,62.7 37.2,62.7 36.5,62 36.5,54.4
+12V on Top Layer "Top Overlay-No Net" (solid, remove dead copper, pour order 8): 2.2,46.8 2.2,42 4.2,40 18.9,40 20,41.1 20,44.4 17.6,46.8
NetDA1_1 on Top Layer "Top Overlay-No Net" (solid, remove dead copper, pour order 6): 9,52.4 15.8,52.4 17.2,51 22.7,51 24.3,49.4 24.3,45.8 23.7,45.2 20.4,45.2 18.4,47.2 9,47.2
NetDA1_2 on Top Layer "Top Overlay-No Net" (solid, remove dead copper, pour order 4): 18.6,51.2 23.1,51.2 24.7,49.6 24.7,46.9 26.9,44.7 33.2,44.7 33.8,45.3 33.8,54.4 33.4,54.8 29.9,54.8 29.1,54 29.1,50 28.9,49.8 25.7,49.8 23.2,52.3 18.6,52.3
NetDA1_5 on Top Layer "Top Overlay-No Net" (solid, remove dead copper, pour order 2): 22,54.7 25.8,54.7 26.1,55 26.1,57.1 25.8,57.4 22,57.4
RESET on Top Layer "Top Overlay-No Net" (solid, remove dead copper, pour order 22): 9,15 15.3,15 15.3,8.5 9,8.5
GND on Top Layer "GND_BoardOutLine" (solid, remove dead copper, pour order 37): 0,1 0,68.73 cw(c1.27,68.73) 1.27,70 63.73,70 cw(c63.73,68.73) 65,68.73 65,1 cw(c64,1) 64,0 1,0 cw(c1,1)
no net on Top Layer "Top Layer-No Net" (solid, remove dead copper, pour order 36): 0,1 0,68.73 cw(c1.27,68.73) 1.27,70 63.73,70 cw(c63.73,68.73) 65,68.73 65,1 cw(c64,1) 64,0 1,0 cw(c1,1)

## Keep-outs
Keep-Out Layer:
  rectangle: 0,0 1,69.2
  rectangle: 0,69 65,70
  rectangle: 64,0 65,70
  rectangle: 0,0 65,1

## Other copper
Top Layer:
  pour cut-out: 58.175,47.575 61.9,47.575 61.9,30.9 58.175,30.9
  pour cut-out: 29.325,12.775 29.325,11.075 30.15,10.15 30.15,9.725 25.975,9.725 25.975,10.15 26.725,10.975 26.75,12.775
  pour cut-out: 19.225,6.414 19.225,2.85 32.675,2.85 32.675,6.439
  pour cut-out: 17.1,12.35 17.1,9.425 19.3,9.425 19.3,12.35
  pour cut-out: 9.15,8.074 10.354,6.87 11.79,5.335 19.225,5.335 19.225,8.45 9.2,8.45 9.2,8.204
  pour cut-out: 33.95,54.475 34.775,54.475 34.775,45.459 35.3,44.85 35.3,41.75 34.65,41.75 34.65,44.15 34.6,44.504 33.602,44.504 33.425,44.65 33.5,44.875 33.95,45.425
  pour cut-out: 22.875,33.05 22.825,27.25 18.275,27.275 18.25,30.175 21.475,33.175
  pour cut-out: 29.35,33.875 29.35,32.525 32.3,32.525 33.5,33.875 33.5,35.6 33.325,36.175 32.775,35.925 31.906,34.793 31.65,34 29.5,34.05
  pour cut-out: 32.1,24.525 31.525,24.525 31.525,27.8 32.1,27.8
  pour cut-out: 29.75,33.875 29.75,29.7 26,29.7 26,30.575 29.35,33.875
  pour cut-out: 33.042,23.206 33.05,21.375 39.8,21.375 40.575,22.05 40.575,22.7 38.8,22.725 38.125,23.225
  pour cut-out: 17.925,16.575 17.925,10.05 23.5,10.05 24.5,10.875 24.5,16.6
  pour cut-out: 14.009,60.815 13.975,53.925 19.264,53.883 19.25,55.7 16.8,58.25 16.35,58.95 16.35,60.825
Bottom Layer:
  pour cut-out: 12.784,26.31 12.784,24.784 12.75,24.75 12.8,24.7 12.925,24.7 16.725,28.5 20.4,28.5 21.675,29.775 21.675,33.725 21.725,33.775 21.725,33.9 31.425,43.6 60.075,43.6 60.525,44.05 60.525,45.175 60.175,45.525 60.15,45.5 30.525,45.5 21.075,36.05 21.075,30.275 20,29.2 15.674,29.2
  pour cut-out: 58.325,47.4 58.325,31.75 62.125,31.75 62.125,47.4
  pour cut-out: 53.9,8.95 53.9,6.525 60.05,6.525 60.05,8.95

## Silkscreen, mask and mechanical layers (free items; w line width, h text height)
Top Overlay:
  lines w0.1: 40.2,16.464 40.2,14.65 43.9,14.65 43.9,9.275
  lines w0.254: 20.525,12.2 ccw(c21.575,12.2) 21.575,11.15 22.625,11.15 ; 32.95,27.15 ccw(c32.95,27.125) 32.925,27.125 32.925,25.975 ccw(c33.125,25.975) 33.125,25.775 ; 34.325,33.15 34.325,32.625 ccw(c34.925,32.625) 34.925,32.025
  text "+12V" at 7.15,54.175 h1 r90
  text "+12V" at 7.5,39.8 h1 r90
  text "Start/Speed" at 48.625,31.075 h1
  text "Direction" at 37.025,8.575 h1
Board:
  lines w0.2: 0,67.5 0,68.73 cw(c1.27,68.73) 1.27,70 2.5,70
  lines w0.254: 0,67.5 0,12.5 0,7.5 0,3.77 0,3.5 0,1 ccw(c1,1) 1,0 1.27,0 63.73,0 64,0 ccw(c64,1) 65,1 65,3.5 65,3.77 65,68.73 ccw(c63.73,68.73) 63.73,70 62.5,70 2.5,70

## Text inside footprints (layer, text, board x,y; h text height)
XP1: Top Overlay "GND" at 6.29,52.916 h1; Top Overlay "VCC" at 6.417,58.25 h1
XP4: Top Overlay "GND" at 6.54,38.416 h1; Top Overlay "VCC" at 6.667,43.75 h1
XP5: Top Overlay "MOSI" at 21.52,6.3 h1 r90; Top Overlay "MISO" at 24.32,6.3 h1 r90; Top Overlay "SCK" at 26.82,6.2 h1 r90; Top Overlay "RESET" at 29.32,6.2 h1 r90; Top Overlay "VCC" at 31.82,6.225 h1 r90; Top Overlay "GND" at 34.27,6.125 h1 r90